# EAGLE board main1 (EAGLE 9.6.2)

Size 100 x 80 mm. Coordinates in mm from the lower left corner, seen from the top.
Outline: 0,0 100,0 100,80 0,80 0,0
Copper layers (1*16): Top 0.035mm / dielectric 1.5mm / Bottom 0.035mm
Design rules "default": minimum track width 6mil, minimum drill 0.35mm, track to track 6mil, track to pad 6mil, pad to pad 6mil, via to via 6mil, smd to smd 6mil, copper to edge 40mil, drill to drill 6mil, minimum pad ring 10mil, minimum via ring 8mil, stop-mask expansion 4mil, vias tented up to drill 0mil, thermal gap 10mil

## Footprints (pad centres in the part's own frame; a part is rotated, then mirrored left to right if it is on the bottom)
C075-052X106 = drill 0.914 octagon: 1 -3.81,0; 2 3.81,0
085CS_1AR = smd 2.9 x 2.5: + 3.25,0; - -3.25,0
DO41-10 = drill 1.118: A 5.08,0; C -5.08,0
SQFP-S-10X10-64 = smd 0.3 x 1.6: 1 -3.75,-5.6; 2 -3.25,-5.6; 3 -2.75,-5.6; 4 -2.25,-5.6; 5 -1.75,-5.6; 6 -1.25,-5.6; 7 -0.75,-5.6; 8 -0.25,-5.6; 9 0.25,-5.6; 10 0.75,-5.6; 11 1.25,-5.6; 12 1.75,-5.6; 13 2.25,-5.6; 14 2.75,-5.6; 15 3.25,-5.6; 16 3.75,-5.6; 33 3.75,5.6; 34 3.25,5.6; 35 2.75,5.6; 36 2.25,5.6; 37 1.75,5.6; 38 1.25,5.6; 39 0.75,5.6; 40 0.25,5.6; 41 -0.25,5.6; 42 -0.75,5.6; 43 -1.25,5.6; 44 -1.75,5.6; 45 -2.25,5.6; 46 -2.75,5.6; 47 -3.25,5.6; 48 -3.75,5.6 | smd 1.6 x 0.3: 17 5.6,-3.75; 18 5.6,-3.25; 19 5.6,-2.75; 20 5.6,-2.25; 21 5.6,-1.75; 22 5.6,-1.25; 23 5.6,-0.75; 24 5.6,-0.25; 25 5.6,0.25; 26 5.6,0.75; 27 5.6,1.25; 28 5.6,1.75; 29 5.6,2.25; 30 5.6,2.75; 31 5.6,3.25; 32 5.6,3.75; 49 -5.6,3.75; 50 -5.6,3.25; 51 -5.6,2.75; 52 -5.6,2.25; 53 -5.6,1.75; 54 -5.6,1.25; 55 -5.6,0.75; 56 -5.6,0.25; 57 -5.6,-0.25; 58 -5.6,-0.75; 59 -5.6,-1.25; 60 -5.6,-1.75; 61 -5.6,-2.25; 62 -5.6,-2.75; 63 -5.6,-3.25; 64 -5.6,-3.75
DIL8 = drill 0.813 long: 1 -3.81,-3.81; 2 -1.27,-3.81; 3 1.27,-3.81; 4 3.81,-3.81; 5 3.81,3.81; 6 1.27,3.81; 7 -1.27,3.81; 8 -3.81,3.81
SOT223 = smd 1.5 x 2: 1 -2.3,-3.15; 2 0,-3.15; 3 2.3,-3.15 | smd 3.8 x 2: 4 0,3.15
MULTIPOWERSO-30 = smd 0.508 x 12: 1 -7,-4; 15 7,-4; 16 7,4; 30 -7,4 | smd 0.508 x 2: 2 -6,-9; 4 -4,-9; 5 -3,-9; 6 -2,-9; 7 -1,-9; 8 0,-9; 9 1,-9; 10 2,-9; 11 3,-9; 12 4,-9; 14 6,-9; 17 6,9; 18 5,9; 19 4,9; 20 3,9; 22 1,9; 24 -1,9; 26 -3,9; 27 -4,9; 28 -5,9; 29 -6,9 | smd 0.508 x 4: 3 -5,-8; 13 5,-8; 21 2,8; 23 0,8; 25 -2,8 | smd 6.5 x 6: OUTA -4.25,3.5; OUTB 4.25,3.5 | smd 1 x 7.5: OUTA@1 -7,-2.755; OUTB@1 7,-2.755 | smd 11 x 6: VCC 0,-3.5 | smd 0.65 x 8.3: VCC@1 0,3.145
M0805 = smd 1.3 x 1.6: 1 -0.95,0; 2 0.95,0

## Placement (x,y rotation side)
C1  0.1uF  [C075-052X106]  50.8,63.5 0 top
C2  1uF  [085CS_1AR]  26.67,64.77 0 top
C3  10uF  [085CS_1AR]  77.47,54.61 0 top
D1  1N4002  [DO41-10]  82.55,43.18 0 top
D2  1N4002  [DO41-10]  68.58,64.77 0 top
IC1  MSP430F133  [SQFP-S-10X10-64]  54.61,41.91 0 top
IC2  HCS410P  [DIL8]  26.67,48.26 0 top
IC3  LM317MBSTT3  [SOT223]  58.42,54.61 0 top
IC4  VNH3SP30  [MULTIPOWERSO-30]  26.67,20.32 0 top
IC5  VNH3SP30  [MULTIPOWERSO-30]  83.82,21.59 0 top
R1  240Ω  [M0805]  85.09,64.77 0 top
R2  2.1K  [M0805]  48.26,53.34 0 top

## Library data of the parts
C1 = rcl
C2 C3 R1 R2 = resistor
D1 D2 = diode
IC1 = texas; MF: TEXAS INSTRUMENTS; MPN: MSP430F133IPM; OC_FARNELL: 1471268; OC_NEWARK: 75C4034
IC2 = microchip; MF: MICROCHIP; MPN: HCS410-I/P; OC_FARNELL: unknown; OC_NEWARK: 96K3679
IC3 = v-reg; PARTNUMBER: LM317M
IC4 IC5 = st-microelectronics; MPN: VNH3SP30-E; OC_FARNELL: 1739420; OC_NEWARK: 33R1486

## Nets
0: IC2.5 IC4.26 IC4.27 IC4.28 IC5.26 IC5.27 IC5.28
AVCC: IC1.64
DVSS: IC1.63
GND: C1.2 C2.- C3.- IC1.62 R2.1
GNDB: IC4.18 IC4.19 IC4.20 IC5.18 IC5.19 IC5.20
N$1: IC1.36 IC2.8
N$2: C3.+ D2.A IC3.1 R1.1 R2.2
N$3: IC1.38 IC2.1
N$4: IC1.39 IC2.2
N$5: IC1.40 IC2.3
N$6: IC1.28 IC5.11
N$7: IC1.29 IC5.5
N$8: IC1.30 IC5.8
N$9: IC1.12 IC4.11
N$10: IC1.13 IC4.5
N$11: IC1.14 IC4.8
VCC: IC4.3 IC4.13 IC4.23 IC4.VCC IC4.VCC@1 IC5.3 IC5.13 IC5.23 IC5.VCC IC5.VCC@1
VIN: C1.1 D1.C IC1.1 IC3.3
VO: C2.+ D1.A D2.C IC3.4 R1.2

## Tracks (layer width: path | path; a pad name or v marks a point on that pad's centre or on a via)
0  (6 unrouted)
GND  (4 unrouted)
GNDB  (5 unrouted)
N$1  (1 unrouted)
N$2  (4 unrouted)
N$3  (1 unrouted)
N$4  (1 unrouted)
N$5  (1 unrouted)
N$6  (1 unrouted)
N$7  (1 unrouted)
N$8  (1 unrouted)
N$9  (1 unrouted)
N$10  (1 unrouted)
N$11  (1 unrouted)
VCC  (9 unrouted)
VIN  (3 unrouted)
VO  (4 unrouted)